# Altium PCB PCB_2.PcbDoc
Units mm, origin at the board's own origin, x right, y up, seen from the top; angles counter-clockwise.
Board outline 166.62 x 84.96 mm, 2 copper layers (Top Layer, Bottom Layer); 79 components, 87 nets, 254 pads, 2 vias.
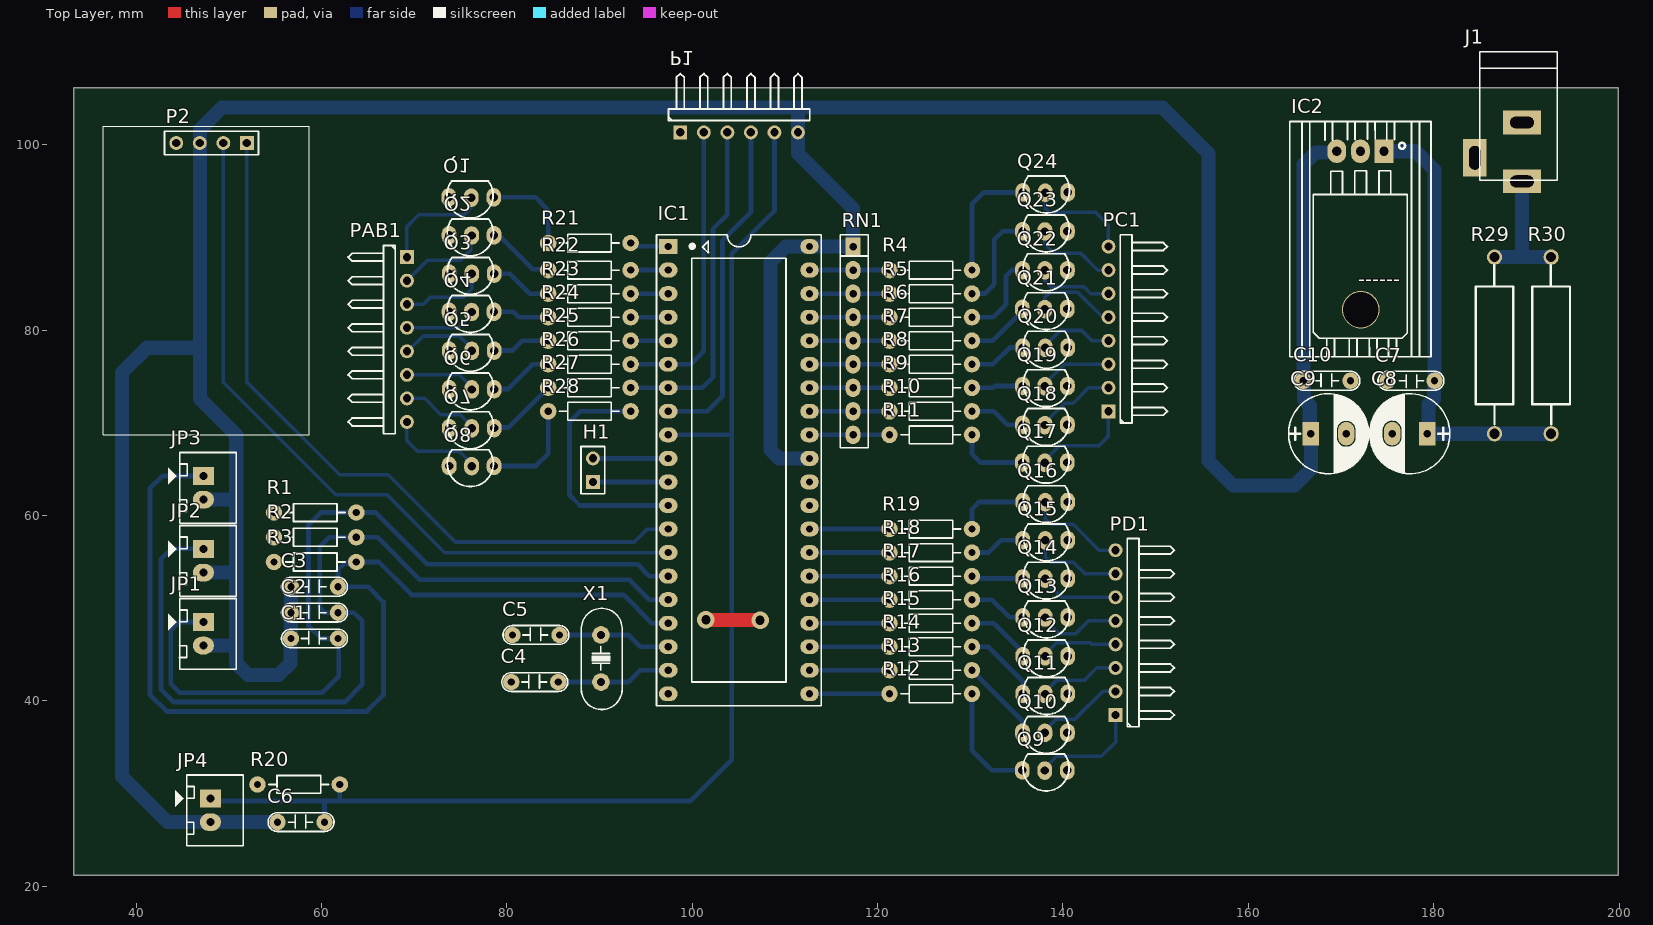
[diagram p0: Top Layer view]
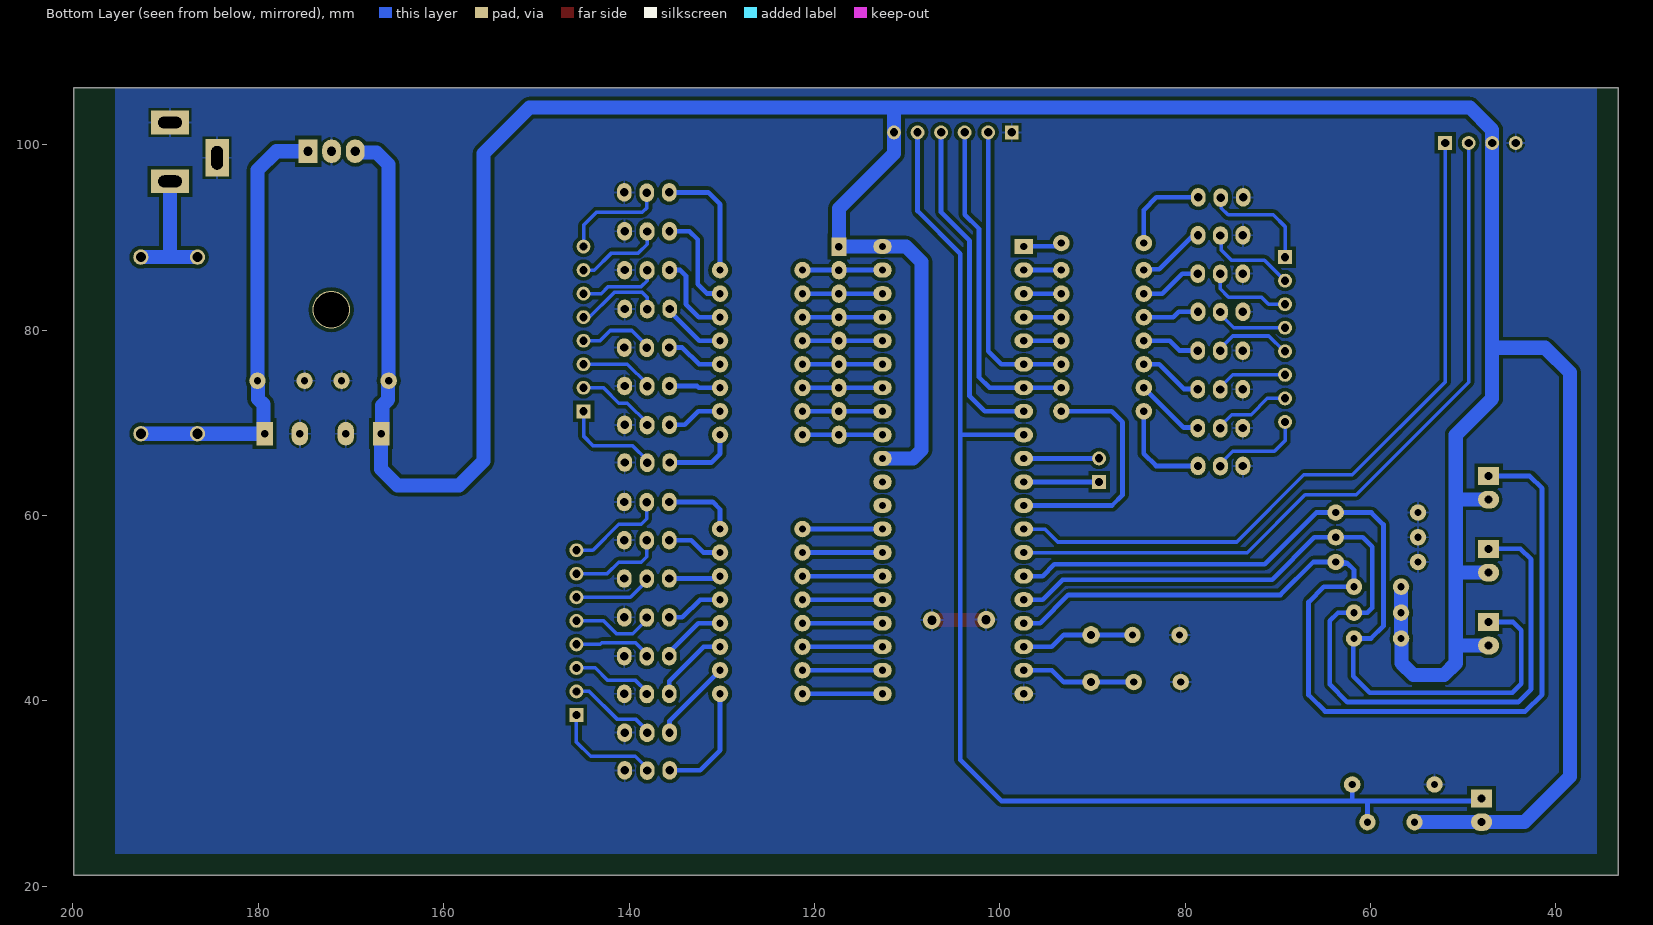
[diagram p1: Bottom Layer view, seen from below]
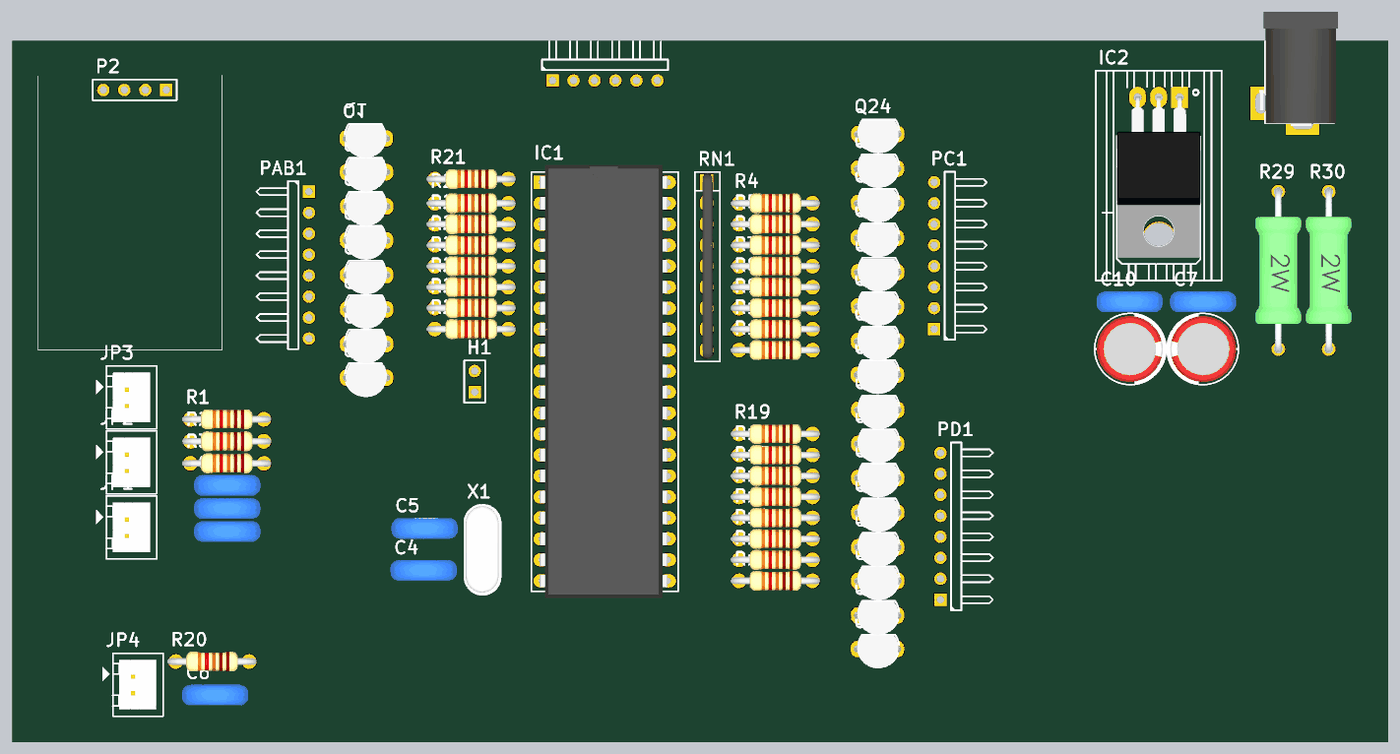
[diagram p2: 3D render of the assembled board from above, using the file's embedded part models]

## Layer stack, top to bottom
Top Solder: solder mask 0.0102, Solder Resist, Dk 3.5
Top Layer: signal copper 0.0356
Dielectric 1: dielectric 0.32, FR-4, Dk 4.8
Bottom Layer: signal copper 0.0356
Bottom Solder: solder mask 0.0102, Solder Resist, Dk 3.5

## Board outline
33.274,21.209 33.274,106.172 199.898,106.172 199.898,21.209

## Design rules (kind name [scope] priority, off if disabled: settings)
Clearance [All] p1: gap=0.381 ignorepadtopadclearanceinfootprint=FALSE except(0.508: Arc-Via Track-Via Via-Via)
PolygonConnect [All] p1: connectstyle=Relief reliefconductorwidth=0.254 reliefentries=4 polygonreliefangle="90 Angle" airgapwidth=0.254
RoutingVias [All] p1: holewidth=0.711 width=1.27 viastyle="Through Hole" minholewidth=0.711 minwidth=1.27 maxholewidth=0.711 maxwidth=1.27
SolderMaskExpansion [All] p1: expansion=0.102 istentingtop=FALSE
Width [All] p1: maxlimit=1.524 minlimit=0.381 preferedwidth=0.508
30 further rules are at their usual default settings.

## Classes and differential pairs
component class Sche_Clock: C1 C5 C7 C8 H1 IC1 IC2 J1 JP1 JP2 JP3 JP4 P2 PAB1 PC1 PD1 Q1 Q2 Q3 Q4 Q5 Q6 Q7 Q8 Q9 Q10 Q11 Q12 Q13 Q14 Q15 Q16 Q17 Q18 Q19 Q20 Q21 Q22 Q23 Q24 R4 R5 R6 R8 R13 R16 R26 R27 R28 R29 R30 RN1 X1

## Components (designator, comment, footprint, x,y, rotation, side; value= is the part's Value field where it differs from the comment)
C1 "104" CN2 59.234,46.736 r0 top value=0.1uF
C2 "104" CN2 59.234,49.53 r0 top value=0.1uF
C3 "104" CN2 59.234,52.324 r0 top value=0.1uF
C4 "22pF" CN2 83.007,42.037 r0 top value=0.1uF
C5 "22pF" CN2 83.134,47.117 r0 top value=0.1uF
C6 "104" CN2 57.785,26.924 r0 top value=0.1uF
C7 "104" CN2 177.546,74.549 r180 top value=0.1uF
C8 "100uF/35V" CP1.5/3.4 179.324,68.834 r180 top value=100uF/35V/50V
C9 "100uF/35V" CP1.5/3.4 166.751,68.834 r0 top value=100uF/35V/50V
C10 "104" CN2 168.475,74.544 r0 top value=0.1uF
H1 "Header 2" HDR1X2 89.281,63.627 r90 top
IC1 "AT89S52" DIP40/W0.6 97.409,89.027 r270 top
IC2 "LM7805" QTO-220NH 174.625,99.314 r180 top
J1 "JACK DC 5MM" "JACK DC 5MM" 189.396,104.902 r270 top
JP1 "JP2" CON2 47.244,48.514 r270 top value="Connector 2"
JP2 "JP2" CON2 47.244,56.388 r270 top value="Connector 2"
JP3 "JP2" CON2 47.244,64.262 r270 top value="Connector 2"
JP4 "JP2" CON2 48.006,29.464 r270 top value="Connector 2"
P1 "ISP" HDR1X6H 98.706,101.346 r0 top
P2 "Header 4" HDR1X4 51.943,100.203 r180 top
PAB1 "Header 8H" HDR1X8H 69.215,87.884 r270 top
PC1 "Header 8H" HDR1X8H 144.907,71.247 r90 top
PD1 "Header 8H" HDR1X8H 145.669,38.481 r90 top
Q1 "NPN" TRAN-LOWPOWER#1 76.016,94.461 r90 top
Q2 "NPN" TRAN-LOWPOWER#1 76.049,90.373 r90 top
Q3 "NPN" TRAN-LOWPOWER#1 76.061,86.233 r90 top
Q4 "NPN" TRAN-LOWPOWER#1 76.049,82.118 r90 top
Q5 "NPN" TRAN-LOWPOWER#1 76.061,77.927 r90 top
Q6 "NPN" TRAN-LOWPOWER#1 76.061,73.76 r90 top
Q7 "NPN" TRAN-LOWPOWER#1 76.061,69.569 r90 top
Q8 "NPN" TRAN-LOWPOWER#1 76.049,65.481 r90 top
Q9 "NPN" TRAN-LOWPOWER#2 138.176,32.639 r90 top
Q10 "NPN" TRAN-LOWPOWER#2 138.188,36.703 r90 top
Q11 "NPN" TRAN-LOWPOWER#2 138.221,40.894 r90 top
Q12 "NPN" TRAN-LOWPOWER#2 138.221,44.958 r90 top
Q13 "NPN" TRAN-LOWPOWER#2 138.221,49.149 r90 top
Q14 "NPN" TRAN-LOWPOWER#2 138.221,53.34 r90 top
Q15 "NPN" TRAN-LOWPOWER#2 138.221,57.475 r90 top
Q16 "NPN" TRAN-LOWPOWER#2 138.221,61.595 r90 top
Q17 "NPN" TRAN-LOWPOWER#2 138.176,65.851 r90 top
Q18 "NPN" TRAN-LOWPOWER#2 138.188,69.915 r90 top
Q19 "NPN" TRAN-LOWPOWER#2 138.188,74.106 r90 top
Q20 "NPN" TRAN-LOWPOWER#2 138.221,78.256 r90 top
Q21 "NPN" TRAN-LOWPOWER#2 138.176,82.423 r90 top
Q22 "NPN" TRAN-LOWPOWER#2 138.188,86.616 r90 top
Q23 "NPN" TRAN-LOWPOWER#2 138.188,90.805 r90 top
Q24 "NPN" TRAN-LOWPOWER#2 138.221,94.996 r90 top
R1 "1k" R1/4W 54.864,60.325 r0 top value="R1/4W - 1K"
R2 "1k" R1/4W 54.864,57.658 r0 top value="R1/4W - 1K"
R3 "1k" R1/4W 54.864,54.991 r0 top value="R1/4W - 1K"
R4 "1k" R1/4W 121.285,86.487 r0 top value="R1/4W - 1K"
R5 "1k" R1/4W 121.285,83.947 r0 top value="R1/4W - 1K"
R6 "1k" R1/4W 121.285,81.407 r0 top value="R1/4W - 1K"
R7 "1k" R1/4W 121.285,78.867 r0 top value="R1/4W - 1K"
R8 "1k" R1/4W 121.285,76.327 r0 top value="R1/4W - 1K"
R9 "1k" R1/4W 121.285,73.787 r0 top value="R1/4W - 1K"
R10 "1k" R1/4W 121.285,71.247 r0 top value="R1/4W - 1K"
R11 "1k" R1/4W 121.285,68.707 r0 top value="R1/4W - 1K"
R12 "1k" R1/4W 121.285,40.767 r0 top value="R1/4W - 1K"
R13 "1k" R1/4W 121.285,43.307 r0 top value="R1/4W - 1K"
R14 "1k" R1/4W 121.285,45.847 r0 top value="R1/4W - 1K"
R15 "1k" R1/4W 121.285,48.387 r0 top value="R1/4W - 1K"
R16 "1k" R1/4W 121.285,50.927 r0 top value="R1/4W - 1K"
R17 "1k" R1/4W 121.285,53.467 r0 top value="R1/4W - 1K"
R18 "1k" R1/4W 121.285,56.007 r0 top value="R1/4W - 1K"
R19 "1k" R1/4W 121.285,58.547 r0 top value="R1/4W - 1K"
R20 "1k" R1/4W 53.086,30.988 r0 top value="R1/4W - 1K"
R21 "1k" R1/4W 84.455,89.408 r0 top value="R1/4W - 1K"
R22 "1k" R1/4W 84.455,86.487 r0 top value="R1/4W - 1K"
R23 "1k" R1/4W 84.455,83.947 r0 top value="R1/4W - 1K"
R24 "1k" R1/4W 84.455,81.407 r0 top value="R1/4W - 1K"
R25 "1k" R1/4W 84.455,78.867 r0 top value="R1/4W - 1K"
R26 "1k" R1/4W 84.455,76.327 r0 top value="R1/4W - 1K"
R27 "1k" R1/4W 84.455,73.793 r0 top value="R1/4W - 1K"
R28 "1k" R1/4W 84.455,71.247 r0 top value="R1/4W - 1K"
R29 "33R" R2W 186.563,78.359 r270 top value="R2W - 47"
R30 "33R" R2W 192.671,78.359 r270 top value="R2W - 47"
RN1 "10K" RN8 117.348,89.027 r270 top value="Tro thanh 10K"
X1 "12Mhz" XT2 90.145,44.577 r270 top value=4Mhz

## Footprints (in the part's own frame and the unit in brackets; to place one, negate y for a bottom-side part, rotate by r counter-clockwise, add the part's x,y. Pads: shape width x height; smd on the part's side, far side on the other; paste and mask are expansions set on the pad)
CN2 [mil]
  round 70 hole 31: 1(-100,0) 2(100,0)
  silkscreen extent -140,-40 140,40, body extent -154,-49 161,50, height 407
CON2 [mil] "CON2"
  rect 75x90 hole 34: 1(0,0)
  oval 75x90 hole 34: 2(100,0)
  silkscreen extent -100,-150 200,140, body extent -68,-70 168,107, height 236
CP1.5/3.4 [mil] "Tu hoa 220->470uF,16V, 470uF/16V,25V"
  rect 70x100 hole 32: 1(0,0)
  oval 70x100 hole 32: 2(150,0)
  silkscreen extent -95,-170 245,170, body extent -85,-157 230,157, height 446
DIP40/W0.6 [mm] "40 PIN, W 600mil, Pin to pin 100mil"
  rect 1.6x2 hole 0.787: 1(0,0)
  oval 1.6x2 hole 0.787: 2(2.54,0) 3(5.08,0) 4(7.62,0) 5(10.16,0) 6(12.7,0) 7(15.24,0) 8(17.78,0) 9(20.32,0) 10(22.86,0) 11(25.4,0) 12(27.94,0) 13(30.48,0) 14(33.02,0) 15(35.56,0) 16(38.1,0) 17(40.64,0) 18(43.18,0) 19(45.72,0) 20(48.26,0) 21(48.26,15.24) 22(45.72,15.24) 23(43.18,15.24) 24(40.64,15.24) 25(38.1,15.24) 26(35.56,15.24) 27(33.02,15.24) 28(30.48,15.24) 29(27.94,15.24) 30(25.4,15.24) 31(22.86,15.24) 32(20.32,15.24) 33(17.78,15.24) 34(15.24,15.24) 35(12.7,15.24) 36(10.16,15.24) 37(7.62,15.24) 38(5.08,15.24) 39(2.54,15.24) 40(0,15.24)
  silkscreen extent -1.28,-1.27 49.53,16.51, body extent -2.09,-0.25 50.35,15.24, height 5.7
HDR1X2 [mm] "Connector; Header; 2 Position"
  rect 1.5x1.5 hole 0.9: 1(0,0)
  round 1.5 hole 0.9: 2(2.54,0)
  silkscreen extent -1.27,-1.27 3.81,1.27
HDR1X4 [mm] "Connector; Header; 4 Position"
  rect 1.5x1.5 hole 0.9: 1(0,0)
  round 1.5 hole 0.9: 2(2.54,0) 3(5.08,0) 4(7.62,0)
  silkscreen extent -1.27,-1.27 8.89,1.27
HDR1X6H [mm] "Connector; Header; 6 Position; Right Angle"
  rect 1.5x1.5 hole 0.9: 1(0,0)
  round 1.5 hole 0.9: 2(2.54,0) 3(5.08,0) 4(7.62,0) 5(10.16,0) 6(12.7,0)
  silkscreen extent -1.27,1.27 13.97,6.35
HDR1X8H [mm] "Connector; Header; 8 Position; Right Angle"
  rect 1.5x1.5 hole 0.9: 1(0,0)
  round 1.5 hole 0.9: 2(2.54,0) 3(5.08,0) 4(7.62,0) 5(10.16,0) 6(12.7,0) 7(15.24,0) 8(17.78,0)
  silkscreen extent -1.27,-6.35 19.05,-1.27
"JACK DC 5MM" [mil]
  rect 100x160 hole 50 slot 100 at 90 deg: 1(348,5) 2(98,5)
  rect 160x100 hole 50 slot 100 at 0 deg: 3(248,-195)
  silkscreen extent -202,-175 343,155, body extent -187,-200 357,174, height 434
QTO-220NH [mil] "TO-220 - 1-2-3"
  rect 80x100 hole 39: 1(0,0)
  oval 80x100 hole 39: 2(100,0) 3(200,0)
  round 160 hole 150: H(98,673)
  silkscreen extent -200,-127 400,873, body extent -100,-4 300,764, height 165
R1/4W [mil] "R 1/4W, 2 Pin, 350mil"
  round 70 hole 31: 1(0,0) 2(350,0)
  silkscreen extent 48,-38 302,38, body extent -40,-47 386,47, height 111
R2W [mil] "dien tro 2W"
  round 65 hole 43.31: 1(-375,0) 2(375,0)
  silkscreen extent -340,-80 335,80, body extent -391,-110 391,110, height 307
RN8 [mm] "R SIP8, 9 Pin"
  rect 2x1.6 hole 0.813: 1(0,0)
  oval 2x1.6 hole 0.813: 2(2.54,0) 3(5.08,0) 4(7.62,0) 5(10.16,0) 6(12.7,0) 7(15.24,0) 8(17.78,0) 9(20.32,0)
  silkscreen extent -1.27,-1.4 21.72,1.65, body extent -1.09,-0.51 21.41,0.74, height 5.57
TRAN-LOWPOWER#1 [mm] "TO, Flat Index; 3 In-Line, Axial Leads; Body Dia. 4.5mm; Leads 0.51 x 0.48 mm (max)"
  oval 2x1.6 hole 0.9: 1(-0.127,2.286) 2(-0.151,-0.139) 3(-0.127,-2.564)
  silkscreen extent -2.35,-2.48 1.63,2.48, body extent -2.48,-3.01 1.52,2.79, height 11
TRAN-LOWPOWER#2 [mm] "TO, Flat Index; 3 In-Line, Axial Leads; Body Dia. 4.5mm; Leads 0.51 x 0.48 mm (max)"
  oval 2x1.6 hole 0.9: 1(-0.127,-2.286) 2(-0.151,0.139) 3(-0.127,2.564)
  silkscreen extent -2.35,-2.48 1.63,2.48, body extent -2.48,-2.79 1.52,3.01, height 11
XT2 [mil] "Footpin for Crystal 2 pin"
  round 75 hole 34: 1(-100,0) 2(100,0)
  silkscreen extent -213,-83 217,90, body extent -216,-87 216,90, height 144

## Part data
C1 C2 C3 C4 C5 C6 C7 C10: library part CN2, "Cap np 104 => 105pF"
C8 C9: library part CP3, "Cap 100uF/35V - 470uF/16V", Description 1="1000uF/6,3V - 470uF/16V - 330uF - 25V", Description 2="220uF/35V - 100uF/50V - 63V - 4,7uF/200V", Description 3="22uF => 33uF100V - 3,3uF => 4,7uF/250V", Description 4="2,2uF =>3,3uF/350 - 2,2uF/400V - 1uF/450V"
H1: "Header, 2-Pin", LatestRevisionDate=17-Jul-2002, LatestRevisionNote="Re-released for DXP Platform.", Publisher="Altium Limited"
IC1: "AT89S52, 8k Byte Flash Memory , 40 Pin"
IC2: library part LM78xx, "On ap +, from + 5 to + 24VDC", =LM7808
JP1 JP2 JP3 JP4: library part Con2, "Connector 2"
P1: library part "Header 6H", "Header, 6-Pin, Right Angle", LatestRevisionDate=17-Jul-2002, LatestRevisionNote="Re-released for DXP Platform.", Publisher="Altium Limited"
P2: "Header, 4-Pin", LatestRevisionDate=17-Jul-2002, LatestRevisionNote="Re-released for DXP Platform.", Publisher="Altium Limited"
PAB1 PC1 PD1: "Header, 8-Pin, Right Angle", LatestRevisionDate=17-Jul-2002, LatestRevisionNote="Re-released for DXP Platform.", Publisher="Altium Limited"
Q1 Q2 Q3 Q4 Q5 Q6 Q7 Q8 Q9 Q10 Q11 Q12 Q13 Q14 Q15 Q16 Q17 Q18 Q19 Q20 Q21 Q22 Q23 Q24: "NPN General", PackageDocument=Sep-1998, Code_JEDEC=TO-92A, ComponentLink1Description="Manufacturer Link", ComponentLink1URL=http://www.fairchildsemi.com/, ComponentLink2Description=Datasheet, ComponentLink2URL=http://www.fairchildsemi.com/ds/2N%2F2N3904.pdf, DatasheetDocument=1997, LatestRevisionDate=15-Jan-2003, LatestRevisionNote="PCB Footprint 'BCY-W3/D4.7' replaced", PackageReference=TO-92A, Published=8-Jun-2000, Publisher="Altium Limited"
R1 R2 R3 R4 R5 R6 R7 R8 R9 R10 R11 R12 R13 R14 R15 R16 R17 R18 R19 R20 R21 R22 R23 R24 R25 R26 R27 R28: library part R1/4W, "Resistor 1/4W"
R29 R30: library part R2W, "Resistor 2W"
RN1: library part RN8, "Resistor 8 (Thanh)"
X1: library part XT2, "Crystal, 32.768 KHz, -40 to 85 degC, 3.2 x 1.5 x 0.9 mm SMD"

## Via types
v1: diameter 1.9, hole 1, Top Layer to Bottom Layer, 2 vias

## Nets (pads, with @x,y where several pads share a name; then routed paths per layer and width w, separated by ;. In a path a pad name is that pad's centre, name@x,y a point inside that pad or via, vN(x,y) a via of type N, cw(c..) or ccw(c..) an arc to the next point about the centre after c; other vN are vias at no path point)
+12: J1.1 R29.1 R30.1 | length 14.3
  Bottom Layer w1.524: R29.1 189.523,87.884 ; J1.1 189.523,87.884 ; R30.1 189.523,87.884
A: Q8.3 R28.1 | length 11
  Bottom Layer w0.508: Q8.3 83.134,65.354 84.455,66.675 R28.1
B0: Q1.3 R21.1 | length 10.4
  Bottom Layer w0.508: Q1.3 83.085,94.334 84.455,92.964 R21.1@84.455,89.052
B1: Q2.3 R22.1 | length 7.4
  Bottom Layer w0.508: Q2.3 79.121,90.246 82.804,86.563 84.379,86.563 R22.1
B2: Q3.3 R23.1 | length 6.7
  Bottom Layer w0.508: Q3.3 80.315,86.106 82.474,83.947 R23.1
B3: Q4.3 R24.1 | length 6.1
  Bottom Layer w0.508: Q4.3 80.696,81.991 81.28,81.407 R24.1
B4: Q5.3 R25.1 | length 6.3
  Bottom Layer w0.508: Q5.3 80.594,77.8 81.661,78.867 R25.1
B5: Q6.3 R26.1 | length 6.9
  Bottom Layer w0.508: Q6.3 78.652,73.66 80.137,73.66 82.804,76.327 R26.1
B6: Q7.3 R27.1 | length 7.6
  Bottom Layer w0.508: Q7.3 78.677,69.494 80.156,69.494 R27.1
C0: Q24.3 R4.2 | length 13.1
  Bottom Layer w0.508: R4.2 130.175,93.599 131.445,94.869 Q24.3
C1: Q23.3 R5.2 | length 11.1
  Bottom Layer w0.508: R5.2 130.181,83.953 131.578,83.953 132.588,84.963 132.588,89.789 133.477,90.678 Q23.3
C2: Q22.3 R6.2 | length 9.4
  Bottom Layer w0.508: R6.2 132.461,81.407 133.858,82.804 133.858,85.886 134.461,86.489 Q22.3
C3: Q21.3 R7.2 | length 7
  Bottom Layer w0.508: R7.2 132.433,78.867 135.612,82.046 Q21.3
C4: Q20.3 R8.2 | length 6.2
  Bottom Layer w0.508: R8.2 132.437,76.327 134.239,78.129 Q20.3
C5: Q19.3 R9.2 | length 5.5
  Bottom Layer w0.508: R9.2 132.461,73.787 132.653,73.979 Q19.3
C6: Q18.3 R10.2 | length 6.1
  Bottom Layer w0.508: R10.2 132.526,71.247 133.985,69.788 Q18.3
C7: Q17.3 R11.2 | length 7.9
  Bottom Layer w0.508: R11.2 130.175,66.675 131.126,65.724 Q17.3
D0: Q9.3 R12.2 | length 12.4
  Bottom Layer w0.508: R12.2 130.175,34.671 132.334,32.512 Q9.3
D1: Q10.3 R13.2 | length 9
  Bottom Layer w0.508: R13.2 135.624,37.858 Q10.3
D2: Q11.3 R14.2 | length 8.4
  Bottom Layer w0.508: R14.2 131.953,45.847 135.657,42.143 Q11.3
D3: Q12.3 R15.2 | length 7.2
  Bottom Layer w0.508: R15.2 132.508,48.387 135.657,45.239 Q12.3
D4: Q13.3 R16.2 | length 6.3
  Bottom Layer w0.508: R16.2 132.334,50.927 134.239,49.022 Q13.3
D5: Q14.3 R17.2 | length 5.6
  Bottom Layer w0.508: R17.2 130.429,53.213 Q14.3
D6: Q15.3 R18.2 | length 6
  Bottom Layer w0.508: R18.2 131.953,56.007 133.294,57.348 Q15.3
D7: Q16.3 R19.2 | length 7.9
  Bottom Layer w0.508: R19.2 130.181,58.553 130.181,60.681 130.969,61.468 Q16.3
GND: C4.1 C5.1 C7.2 C8.2 C9.2 C10.2 IC1.20 IC2.2 J1.2 J1.3 P1.1 P2.4 Q1.1 Q2.1 Q3.1 Q4.1 Q5.1 Q6.1 Q7.1 Q8.1 Q9.1 Q10.1 Q11.1 Q12.1 Q13.1 Q14.1 Q15.1 Q16.1 Q17.1 Q18.1 Q19.1 Q20.1 Q21.1 Q22.1 Q23.1 Q24.1 R1.1 R2.1 R3.1 R20.1 | length 5.9
  Top Layer w1.524: v1(101.473,48.768) 101.498,48.743 107.29,48.743 v1(107.315,48.719)
MISO: IC1.7 P1.3 R27.2 | length 36.4
  Bottom Layer w0.508: R27.2 93.348,73.79 97.406,73.79 IC1.7 101.092,73.787 102.235,74.93 102.235,90.932 103.786,92.483 P1.3
MOSI: IC1.6 P1.2 R26.2 | length 32.1
  Bottom Layer w0.508: R26.2 IC1.6 99.822,76.327 101.246,77.751 P1.2
NetC7_1: C7.1 C8.1 IC2.1 R29.2 R30.2 | length 48.4
  Bottom Layer w1.524: IC2.1 178.054,99.314 180.086,97.282 C7.1 180.037,74.5 180.037,72.595 179.451,72.009 179.451,68.961 C8.1 R29.2 R30.2
NetH1_1: H1.1 IC1.11 | length 8.1
  Bottom Layer w0.508: H1.1 IC1.11
NetH1_2: H1.2 IC1.10 | length 8.1
  Bottom Layer w0.508: H1.2 IC1.10
NetIC1_1: IC1.1 R21.2 | length 4.1
  Bottom Layer w0.508: R21.2@93.345,89.052 97.384,89.052 IC1.1
NetIC1_2: IC1.2 R22.2 | length 4.1
  Bottom Layer w0.508: R22.2 IC1.2
NetIC1_3: IC1.3 R23.2 | length 4.1
  Bottom Layer w0.508: R23.2 IC1.3
NetIC1_4: IC1.4 R24.2 | length 4.1
  Bottom Layer w0.508: R24.2 IC1.4
NetIC1_5: IC1.5 R25.2 | length 4.1
  Bottom Layer w0.508: R25.2 IC1.5
NetIC1_12: IC1.12 R28.2 | length 26.1
  Bottom Layer w0.508: R28.2 87.911,71.247 86.741,70.077 86.741,62.23 87.884,61.087 IC1.12
NetIC1_21: IC1.21 R12.1 | length 8.6
  Bottom Layer w0.508: IC1.21 R12.1
NetIC1_22: IC1.22 R13.1 | length 8.6
  Bottom Layer w0.508: IC1.22 R13.1
NetIC1_23: IC1.23 R14.1 | length 8.6
  Bottom Layer w0.508: IC1.23 R14.1
NetIC1_24: IC1.24 R15.1 | length 8.6
  Bottom Layer w0.508: IC1.24 R15.1
NetIC1_25: IC1.25 R16.1 | length 8.6
  Bottom Layer w0.508: IC1.25 R16.1
NetIC1_26: IC1.26 R17.1 | length 8.6
  Bottom Layer w0.508: IC1.26 R17.1
NetIC1_27: IC1.27 R18.1 | length 8.6
  Bottom Layer w0.508: IC1.27 R18.1
NetIC1_28: IC1.28 R19.1 | length 8.6
  Bottom Layer w0.508: IC1.28 R19.1
NetIC1_32: IC1.32 R11.1 RN1.9 | length 8.6
  Bottom Layer w0.508: IC1.32 RN1.9 R11.1
NetIC1_33: IC1.33 R10.1 RN1.8 | length 8.6
  Bottom Layer w0.508: IC1.33 RN1.8 R10.1
NetIC1_34: IC1.34 R9.1 RN1.7 | length 8.6
  Bottom Layer w0.508: IC1.34 RN1.7 R9.1
NetIC1_35: IC1.35 R8.1 RN1.6 | length 8.6
  Bottom Layer w0.508: IC1.35 RN1.6 R8.1
NetIC1_36: IC1.36 R7.1 RN1.5 | length 8.6
  Bottom Layer w0.508: IC1.36 RN1.5 R7.1
NetIC1_37: IC1.37 R6.1 RN1.4 | length 8.6
  Bottom Layer w0.508: IC1.37 RN1.4 R6.1
NetIC1_38: IC1.38 R5.1 RN1.3 | length 8.6
  Bottom Layer w0.508: IC1.38 RN1.3 R5.1
NetIC1_39: IC1.39 R4.1 RN1.2 | length 8.6
  Bottom Layer w0.508: IC1.39 RN1.2 R4.1
NetPAB1_1: PAB1.1 Q1.2 | length 12.2
  Bottom Layer w0.381: PAB1.1 69.215,91.186 70.485,92.456 75.363,92.456 76.078,93.171 76.078,94.233 Q1.2
NetPAB1_2: PAB1.2 Q2.2 | length 9.8
  Bottom Layer w0.381: PAB1.2 71.438,87.566 74.993,87.566 76.078,88.651 76.078,90.112 Q2.2
NetPAB1_3: PAB1.3 Q3.2 | length 9.3
  Bottom Layer w0.381: PAB1.3 70.993,82.804 71.755,83.566 75.311,83.566 76.2,84.455 Q3.2
NetPAB1_4: PAB1.4 Q4.2 | length 7.8
  Bottom Layer w0.381: PAB1.4 74.735,80.264 76.188,81.717 Q4.2
NetPAB1_5: PAB1.5 Q5.2 | length 8.5
  Bottom Layer w0.381: PAB1.5 69.306,77.724 70.957,79.375 74.851,79.375 76.2,78.026 Q5.2
NetPAB1_6: PAB1.6 Q6.2 | length 7.8
  Bottom Layer w0.381: PAB1.6 74.875,75.184 76.2,73.859 Q6.2
NetPAB1_7: PAB1.7 Q7.2 | length 8.5
  Bottom Layer w0.381: PAB1.7 71.12,72.644 72.877,70.887 74.982,70.887 76.2,69.668 Q7.2
NetPAB1_8: PAB1.8 Q8.2 | length 10.3
  Bottom Layer w0.381: PAB1.8 69.215,68.072 70.358,66.929 74.839,66.929 76.188,65.58 Q8.2
NetPC1_1: PC1.1 Q17.2 | length 10.9
  Bottom Layer w0.381: Q17.2 138.037,65.951 139.6,67.513 143.84,67.513 144.907,68.58 PC1.1
NetPC1_2: PC1.2 Q18.2 | length 8.7
  Bottom Layer w0.381: Q18.2 138.049,70.015 140.17,72.136 141.097,72.136 142.748,73.787 PC1.2
NetPC1_3: PC1.3 Q19.2 | length 8
  Bottom Layer w0.381: Q19.2 138.049,74.206 140.17,76.327 PC1.3
NetPC1_4: PC1.4 Q20.2 | length 8.2
  Bottom Layer w0.381: Q20.2 138.082,78.355 139.696,79.969 142.027,79.969 143.129,78.867 PC1.4
NetPC1_5: PC1.5 Q21.2 | length 9.6
  Bottom Layer w0.381: Q21.2 138.037,83.53 138.581,84.074 141.605,84.074 144.399,81.28 144.78,81.28 PC1.5
NetPC1_6: PC1.6 Q22.2 | length 8.6
  Bottom Layer w0.381: Q22.2 138.049,85.344 138.684,84.709 142.239,84.709 143.001,83.947 PC1.6
NetPC1_7: PC1.7 Q23.2 | length 9.4
  Bottom Layer w0.381: Q23.2 138.049,89.281 139.001,88.329 141.894,88.329 143.736,86.487 PC1.7
NetPC1_8: PC1.8 Q24.2 | length 11.5
  Bottom Layer w0.381: Q24.2 138.082,93.185 138.557,92.71 143.51,92.71 144.907,91.313 PC1.8
NetPD1_1: PD1.1 Q9.2 | length 12
  Bottom Layer w0.381: Q9.2 138.037,32.738 139.335,34.036 144.145,34.036 145.669,35.56 PD1.1
NetPD1_2: PD1.2 Q10.2 | length 9.6
  Bottom Layer w0.381: Q10.2 138.049,36.802 139.295,38.048 141.299,38.048 144.272,41.021 PD1.2
NetPD1_3: PD1.3 Q11.2 | length 8.9
  Bottom Layer w0.381: Q11.2 138.082,40.993 139.3,42.211 142.287,42.211 143.637,43.561 PD1.3
NetPD1_4: PD1.4 Q12.2 | length 8.4
  Bottom Layer w0.381: Q12.2 138.082,45.057 139.3,46.275 142.955,46.275 143.129,46.101 PD1.4
NetPD1_5: PD1.5 Q13.2 | length 9
  Bottom Layer w0.381: Q13.2 138.082,48.748 139.586,47.244 141.351,47.244 142.748,48.641 PD1.5
NetPD1_6: PD1.6 Q14.2 | length 8.6
  Bottom Layer w0.381: Q14.2 138.082,52.939 139.84,51.181 PD1.6
NetPD1_7: PD1.7 Q15.2 | length 10.1
  Bottom Layer w0.381: Q15.2 138.082,55.569 138.684,54.967 141.121,54.967 142.367,53.721 PD1.7
NetPD1_8: PD1.8 Q16.2 | length 10.8
  Bottom Layer w0.381: Q16.2 138.082,59.657 138.684,59.055 141.097,59.055 143.891,56.261 PD1.8
RST: C6.2 IC1.9 JP4.1 P1.5 R20.2 | length 138.8
  Bottom Layer w0.508: JP4.1 48.26,29.21 60.198,29.21 ; C6.2 60.325,29.083 60.198,29.21 ; R20.2 61.976,29.21 ; IC1.9 104.243,68.707 ; P1.5 108.866,92.864 104.267,88.265 104.267,70.294 104.243,70.271 104.243,68.707 ; 60.198,29.21 61.976,29.21 ; 61.976,29.21 99.822,29.21 104.243,33.631 104.243,68.707
SCK: IC1.8 P1.4 | length 36.2
  Bottom Layer w0.508: IC1.8 101.6,71.247 103.251,72.898 103.251,89.662 106.326,92.737 P1.4
SCL: IC1.13 P2.1 | length 79
  Bottom Layer w0.381: P2.1 51.943,74.409 61.963,64.389 67.183,64.389 74.422,57.15 93.726,57.15 95.123,58.547 IC1.13
SDA: IC1.14 P2.2 | length 81.4
  Bottom Layer w0.381: P2.2 49.403,74.371 61.544,62.23 67.056,62.23 73.279,56.007 IC1.14
SW1: C1.2 IC1.15 JP1.1 R1.2 | length 89.9
  Bottom Layer w0.508: JP1.1 44.602,48.514 43.713,47.625 43.713,41.859 44.679,40.894 60.071,40.894 61.849,42.672 61.849,46.661 C1.2 59.944,46.736 58.599,48.081 58.599,59.031 59.893,60.325 R1.2 65.833,60.325 71.421,54.737 94.107,54.737 95.377,53.467 IC1.15
SW2: C2.2 IC1.16 JP2.1 R2.2 | length 101.5
  Bottom Layer w0.508: JP2.1 47.219,56.413 43.815,56.413 42.672,55.27 42.672,41.275 44.069,39.878 62.484,39.878 64.389,41.783 64.389,48.641 63.5,49.53 C2.2 60.325,49.53 59.817,50.038 59.817,56.642 60.833,57.658 R2.2 66.04,57.658 70.612,53.086 93.218,53.086 95.377,50.927 IC1.16
SW3: C3.2 IC1.17 JP3.1 R3.2 | length 111.4
  Bottom Layer w0.508: JP3.1 42.799,64.262 41.485,62.948 41.485,40.684 43.307,38.862 64.897,38.862 66.675,40.64 66.675,50.673 65.024,52.324 C3.2 61.774,54.154 62.484,54.864 63.627,54.864 R3.2 66.157,54.991 69.713,51.435 92.583,51.435 95.631,48.387 IC1.17
VCC: C1.1 C2.1 C3.1 C6.1 C9.1 C10.1 IC1.31 IC1.40 IC2.3 JP1.2 JP2.2 JP3.2 JP4.2 P1.6 P2.3 RN1.1 | length 404.2
  Bottom Layer w1.524: JP1.2 50.673,45.974 50.8,46.101 ; JP2.2 50.673,53.848 50.8,53.975 ; JP3.2 50.8,61.722 ; C6.1 JP4.2 43.386,26.924 38.481,31.829 38.481,75.438 41.148,78.105 46.863,78.105 ; C3.1 C2.1 C1.1 56.646,46.687 56.646,44.073 55.372,42.799 52.07,42.799 50.8,44.069 50.8,46.101 ; IC1.31 109.351,66.167 108.458,67.06 108.458,87.376 110.109,89.027 IC1.40 RN1.1 117.348,93.142 111.406,99.084 P1.6 111.406,103.986 111.379,104.013 ; IC2.3 169.418,99.187 167.259,99.187 165.935,97.863 C10.1 165.984,74.495 165.984,72.522 166.624,71.882 166.624,68.961 C9.1 166.751,65.024 164.973,63.246 158.331,63.246 155.702,65.875 155.702,99.06 150.749,104.013 111.379,104.013 ; 46.863,78.105 P2.3 46.863,101.6 49.276,104.013 111.379,104.013 ; 46.863,78.105 46.863,72.644 50.8,68.707 50.8,61.722 ; 50.8,46.101 50.8,53.975 ; 50.8,53.975 50.8,61.722
XTLA1: C5.2 IC1.18 X1.1 | length 12.3
  Bottom Layer w0.508: C5.2 X1.1 93.106,47.117 94.376,45.847 IC1.18
XTLA2: C4.2 IC1.19 X1.2 | length 12.4
  Bottom Layer w0.508: C4.2 X1.2 93.091,42.037 94.361,43.307 IC1.19
pads on no net: IC1.29 IC1.30 IC2.H

## Polygon pours and split planes (outlines as drawn)
GND on Bottom Layer "Bottom Layer-GND" (solid, pour order 0): 195.453,106.172 195.453,23.495 35.56,23.495 35.56,106.172

## Silkscreen, mask and mechanical layers (free items; w line width, h text height)
Top Overlay:
  lines w0.05: 36.449,68.707 36.449,101.981 58.674,101.981 58.674,68.707 36.449,68.707
Drill Drawing:
  the board outline again, w0.05

## Text inside footprints (layer, text, board x,y; h text height)
IC2: Top Overlay "------" at 176.378,85.928 h1.52 r180